# Altium PCB PCB22.PcbDoc
Units mm, origin at the board's own origin, x right, y up, seen from the top; angles counter-clockwise.
Board outline 123.19 x 80.01 mm, 2 copper layers (Top Layer, Bottom Layer); 31 components, 35 nets, 115 pads, 23 vias.
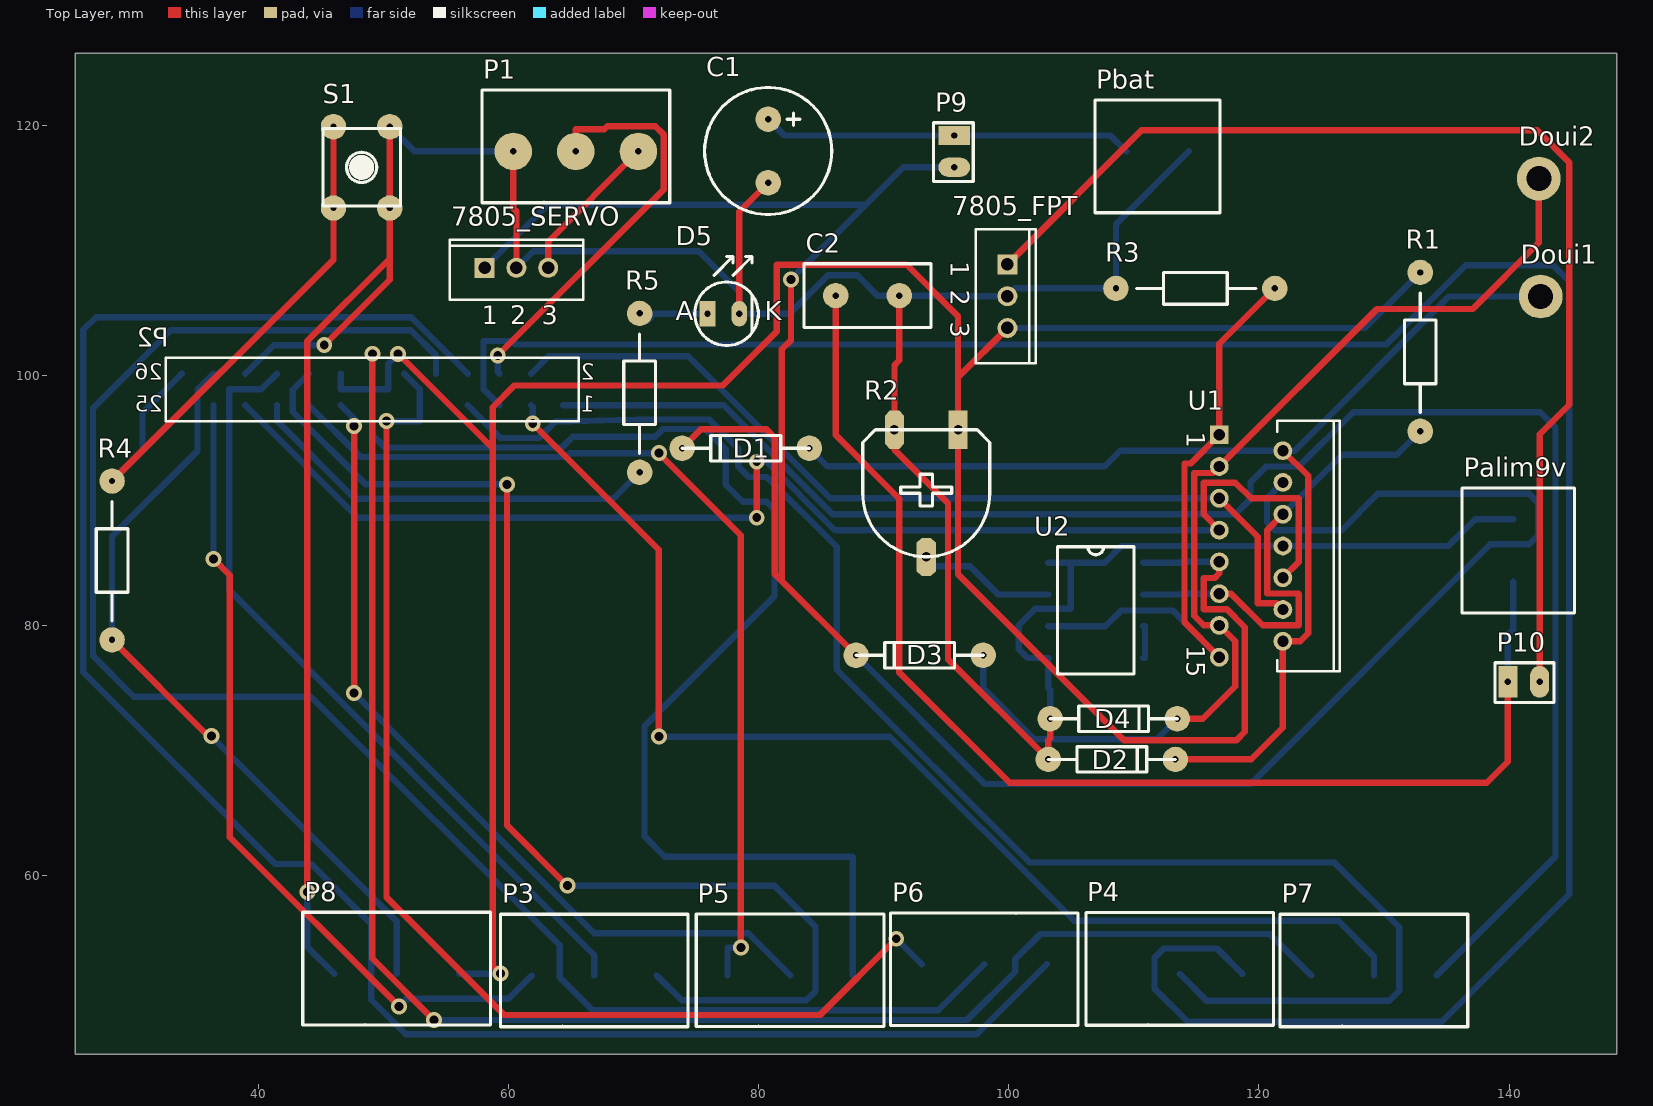
[diagram p0: Top Layer view]
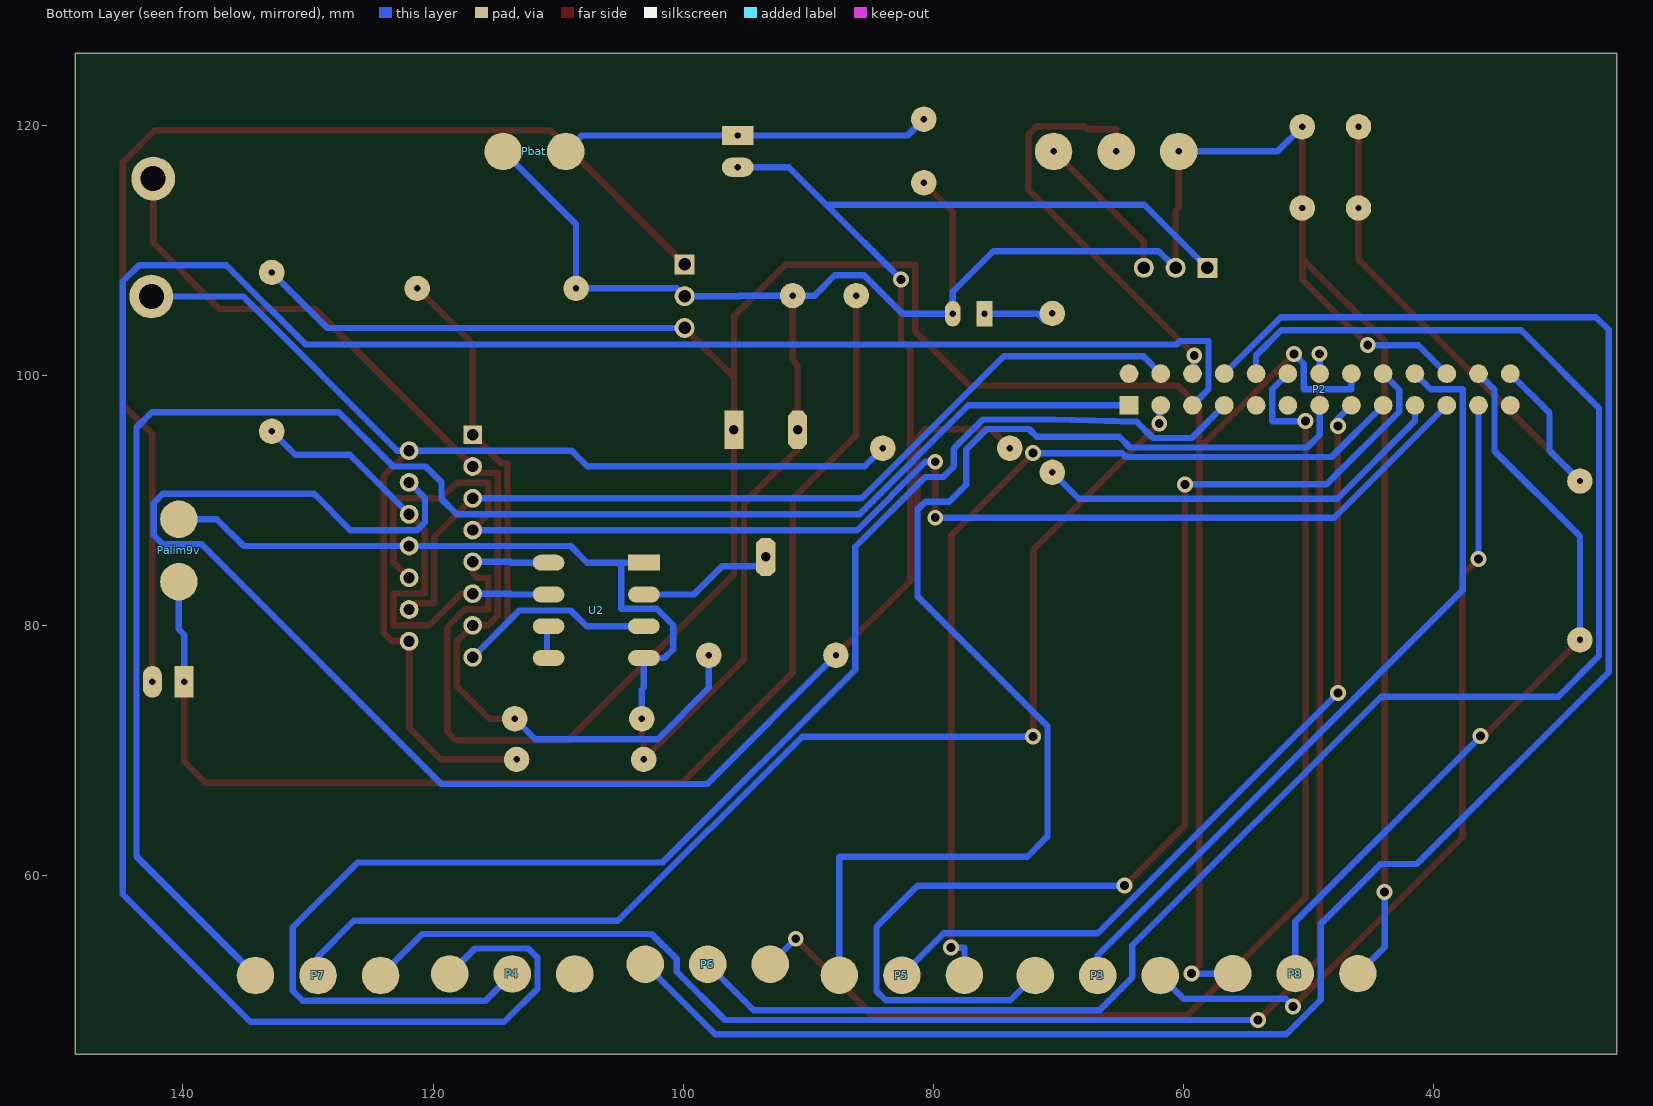
[diagram p1: Bottom Layer view, seen from below]

## Layer stack, top to bottom
Top Layer: signal copper 0.0356
Dielectric: dielectric 0.32, FR-4, Dk 4.8
Bottom Layer: signal copper 0.0356

## Board outline
25.4,125.73 148.59,125.73 148.59,45.72 25.4,45.72

## Design rules (kind name [scope] priority, off if disabled: settings)
Clearance [All] p1: gap=0.254
PolygonConnect [All] p1: connectstyle=Relief reliefconductorwidth=0.254 reliefentries=4 polygonreliefangle="90 Angle"
RoutingLayers RoutingLayers_1 [(InNet('RX') OR InNet('IN1') OR InNet('IN2') OR InNet('IN3'))] p1: top layer_v5=FALSE bottom layer_v5=TRUE
RoutingLayers [All] p2: top layer_v5=TRUE bottom layer_v5=TRUE
RoutingVias [All] p1: holewidth=0.711 width=1.27 viastyle="Through Hole" minholewidth=0.711 minwidth=1.27 maxholewidth=0.711 maxwidth=1.27
SilkscreenOverComponentPads [All] p1: minsilkscreentomaskgap=0.254
SolderMaskExpansion [All] p1: expansion=0.102
Width [All] p1: maxlimit=0.508 minlimit=0.508 preferedwidth=0.508
26 further rules are at their usual default settings.

## Components (designator, comment, footprint, x,y, rotation, side; value= is the part's Value field where it differs from the comment)
7805_FPT "SCR" TO-220-AB 99.9,106.325 r270 top
7805_SERVO "SCR" TO-220-AB 60.65,108.6 r0 top
C1 "Cap Pol2" Capa2_pol 80.775,120.475 r270 top
C2 "Cap2" CAPA2 86.175,106.375 r0 top
D1 "Diode 1N4148" Ddiode 73.9,94.175 r0 top
D2 "Diode 1N4148" Ddiode 113.325,69.3 r180 top
D3 "Diode 1N4148" Ddiode 87.8,77.625 r0 top
D4 "Diode 1N4148" Ddiode 113.475,72.55 r180 top
D5 "Led" LED 75.925,104.925 r0 top
Doui1 "douille_2mm" Douille-2mm 142.525,106.3 r90 top
Doui2 "douille_2mm" Douille-2mm 142.375,115.725 r90 top
P1 "Bornier Servomoteur" Bornier_3#1 72.9,117.9 r180 top
P2 "Header 13X2" HDR2X13 64.375,97.6 r180 top
P3 "Bornier_3" Bornier_3#2 74.375,52.025 r180 top
P4 "Bornier_3" Bornier_3#2 121.175,52.15 r180 top
P5 "Bornier_3" Bornier_3#2 90.025,52.05 r180 top
P6 "Bornier_3" Bornier_3#2 90.55,52.925 r0 top
P7 "Bornier_3" Bornier_3#2 136.7,52.025 r180 top
P8 "Bornier_3" Bornier_3#2 58.575,52.175 r180 top
P9 "Jumper" picot2 95.65,119.175 r0 top
P10 "Jumper" picot2 139.9,75.5 r90 top
Palim9v "Alim 9V" Bornier_2 140.325,81 r90 top
Pbat "Batterie" Bornier_2 106.9,117.9 r0 top
R1 "Res2" res5_1/4W 132.9,95.525 r90 top
R2 "RPot" AJUSTABLE 95.95,95.65 r180 top
R3 "Res2" res5_1/4W 121.275,106.95 r180 top
R4 "Res2" res5_1/4W 28.325,78.85 r90 top
R5 "Res2" res5_1/4W 70.5,92.25 r90 top
S1 "SW-PB" SW_BP 48.275,116.625 r270 top
U1 "L298N" Multiwatt15V 119.38,86.36 r270 top
U2 "LM311N" DIP8 103.15,85.025 r0 top

## Footprints (in the part's own frame and the unit in brackets; to place one, negate y for a bottom-side part, rotate by r counter-clockwise, add the part's x,y. Pads: shape width x height; smd on the part's side, far side on the other; paste and mask are expansions set on the pad)
AJUSTABLE [mil]
  rect 60x120 hole 30: 1(0,0)
  oct 60x120 hole 30: 2(100,400) 3(200,0)
  silkscreen extent -100,0 300,400
Bornier_2 [mm]
  round 3 smd far side: 1(2.5,0) 2(7.5,0)
  silkscreen extent 0,-4.9 10,4.1
Bornier_3#1 [mm]
  round 3 hole 0.508: 1(2.5,0) 2(7.5,0) 3(12.5,0)
  silkscreen extent 0,-4.9 15,4.1
Bornier_3#2 [mm]
  round 3 smd far side: 1(2.5,0) 2(7.5,0) 3(12.5,0)
  silkscreen extent 0,-4.9 15,4.1
CAPA2 [mil]
  round 80 hole 20: 1(0,0) 2(200,0)
  silkscreen extent -100,-100 300,100
Capa2_pol [mil]
  round 80 hole 20: 1(0,0) 2(200,0)
  silkscreen extent -100,-200 300,200
Ddiode [mil]
  round 80 hole 20: A(400,0) K(0,0)
  silkscreen extent 0,-40 400,40
DIP8 [mil]
  rect 100x50 smd far side: 1(0,0)
  oval 100x50 smd far side: 2(0,-100) 3(0,-200) 4(0,-300) 5(300,-300) 6(300,-200) 7(300,-100) 8(300,0)
  silkscreen extent 30,-350 270,50
Douille-2mm [mm]
  round 3.5 hole 2: 1(0,0)
HDR2X13 [mm] "Connector; Header; 13x2 Position"
  rect 1.5x1.5 smd far side: 1(0,0)
  round 1.5 smd far side: 2(0,-2.54) 3(2.54,0) 4(2.54,-2.54) 5(5.08,0) 6(5.08,-2.54) 7(7.62,0) 8(7.62,-2.54) 9(10.16,0) 10(10.16,-2.54) 11(12.7,0) 12(12.7,-2.54) 13(15.24,0) 14(15.24,-2.54) 15(17.78,0) 16(17.78,-2.54) 17(20.32,0) 18(20.32,-2.54) 19(22.86,0) 20(22.86,-2.54) 21(25.4,0) 22(25.4,-2.54) 23(27.94,0) 24(27.94,-2.54) 25(30.48,0) 26(30.48,-2.54)
  silkscreen extent -1.27,-3.81 31.75,1.27
LED [mil]
  rect 50x80 hole 20: 1(0,0)
  oval 50x80 hole 20: 2(100,0)
  silkscreen extent -40,-100 160,180
Multiwatt15V [mm] "TO, Thru-Hole, Vertical, Heatsink Mounted; 15 Bent Staggered Leads; Pitch 1.27 mm"
  rect 1.5x1.5 hole 0.9: 1(-8.89,-2.54)
  round 1.5 hole 0.9: 2(-7.62,2.54) 3(-6.35,-2.54) 4(-5.08,2.54) 5(-3.81,-2.54) 6(-2.54,2.54) 7(-1.27,-2.54) 8(0,2.54) 9(1.27,-2.54) 10(2.54,2.54) 11(3.81,-2.54) 12(5.08,2.54) 13(6.35,-2.54) 14(7.62,2.54) 15(8.89,-2.54)
  silkscreen extent -10,2.09 10,7.09
picot2 [mil]
  rect 100x60 hole 20: 1(0,0)
  oval 100x60 hole 20: 2(0,-100)
  silkscreen extent -65,-145 60,40
res5_1/4W [mil]
  round 80 hole 20: 1(0,0) 2(500,0)
  silkscreen extent 60,-50 435,50
SW_BP [mil]
  round 80 hole 20: 1(-127.95,88.58) 2(127.95,88.58) 3(-127.95,-88.58) 4(127.95,-88.58)
  silkscreen extent -122,-122 122,122
TO-220-AB [mm] "TO, Thru-Hole, Vertical, Heatsink Mounted; 3 In-Line Leads; Pitch 2.54 mm"
  rect 1.6x1.6 hole 1: 1(-2.54,0)
  round 1.6 hole 1: 2(0,0) 3(2.54,0)
  silkscreen extent -5.35,-2.55 5.35,2.25

## Part data
7805_FPT 7805_SERVO: "Silicon Controlled Rectifier"
C1: "Polarized Capacitor (Radial)"
C2: "Capacitor"
D1 D2 D3 D4: "High Conductance Fast Diode"
D5: "LED"
Doui1 Doui2: "1-Pin"
P1: library part Bornier_3, "Header, 3-Pin"
P2: "Header, 13-Pin, Dual row"
P3 P4 P5 P6 P7 P8: "Header, 3-Pin"
Palim9v Pbat: library part Bornier_2, "Header, 2-Pin"
R1 R3 R4 R5: "Resistor"
R2: "Potentiometer"
S1: "Switch"
U1: "Dual Full Bridge Driver"
U2: "Voltage Comparator"

## Via types
v1: diameter 1.27, hole 0.711, Top Layer to Bottom Layer, 23 vias

## Nets (pads, with @x,y where several pads share a name; then routed paths per layer and width w, separated by ;. In a path a pad name is that pad's centre, name@x,y a point inside that pad or via, vN(x,y) a via of type N, cw(c..) or ccw(c..) an arc to the next point about the centre after c; other vN are vias at no path point)
3V3FLYPORT: P2.24 P8.2 R4.1 | length 60.9
  Top Layer w0.508: R4.1 36.017,71.158 v1(36.259,71.158)
  Bottom Layer w0.508: R4.1 28.325,87.126 35.154,93.955 35.154,98.859 P2.24 ; v1(36.259,71.158) 51.075,56.342 P8.2
AN1_23: P2.23 P3.3 | length 65.8
  Top Layer w0.508: v1(36.435,85.333) 37.744,84.023 37.744,63.068 v1(51.257,49.555)
  Bottom Layer w0.508: v1(36.435,85.333) P2.23 ; v1(51.257,49.555) 51.867,50.165 60.015,50.165 P3.3
AN4_18: P2.18 P3.1 | length 97.3
  Top Layer w0.508: v1(59.893,91.288) 59.893,64.033 v1(64.719,59.207)
  Bottom Layer w0.508: P2.18 42.774,98.859 42.774,97.102 48.588,91.288 v1(59.893,91.288) ; v1(64.719,59.207) 81.28,59.207 84.557,55.931 84.557,50.775 83.82,50.038 73.862,50.038 P3.1
AN5_20: P2.20 P3.2 | length 63.3
  Bottom Layer w0.508: P2.20 40.257,98.882 37.694,98.882 37.694,82.837 66.875,53.655 P3.2
BOARD_LED: P2.19 R5.1 | length 33.7
  Bottom Layer w0.508: P2.19 41.515,96.369 47.739,90.145 68.395,90.145 R5.1
EN: R1.1 U1.6 U1.11 U2.7 | length 39.1
  Top Layer w0.508: U1.11 117.773,82.55 120.301,80.022 123.178,80.022 123.178,82.525 123.141,82.562 120.662,82.562 120.662,87.642 U1.6
  Bottom Layer w0.508: U2.7 113.767,82.485 113.832,82.55 U1.11 ; U1.6 126.67,93.65 131.025,93.65 R1.1
GND: 7805_FPT.2 7805_SERVO.2 C1.2 C2.2 D2.A D4.A D5.2 P1.3 P2.22 P8.3 Palim9v.2 Pbat.2 R2.3 R3.2 S1.1 S1.2 U1.8 U2.1 U2.4 | length 288.4
  Top Layer w0.508: v1(43.942,58.699) 43.942,102.743 50.525,109.326 ; v1(45.288,102.413) 50.525,107.65 50.525,109.326 ; S1.1 S1.2 50.525,109.326 ; P1.3 60.4,113.356 60.65,113.106 7805_SERVO.2 ; D5.2 78.465,113.085 C1.2 ; C2.2 91.255,101.198 90.87,100.813 R2.3 90.87,94.042 95.148,89.764 95.148,77.317 D2.A 103.165,70.841 103.315,70.991 D4.A
  Bottom Layer w0.508: P2.22 41.248,102.413 v1(45.288,102.413) ; v1(43.942,58.699) 43.942,54.308 P8.3 ; S1.1 52.5,117.9 P1.3 ; 7805_SERVO.2 61.981,109.931 75.214,109.931 78.465,106.68 D5.2 82.479,104.925 85.554,108.001 87.884,108.001 89.51,106.375 C2.2 95.529,106.375 95.579,106.325 7805_FPT.2 100.525,106.95 R3.2 108.575,112.075 Pbat.2 ; U2.1 104.953,85.025 ; D4.A 103.315,74.879 103.15,75.044 U2.4 101.513,77.405 100.813,78.105 100.813,80.01 102.133,81.331 104.953,81.331 104.953,85.025 ; Palim9v.2 137.287,88.5 135.147,86.36 U1.8 109.006,86.36 107.671,85.025 104.953,85.025
I2C_CLK: P2.1 P7.1 | length 135.3
  Bottom Layer w0.508: P2.1 77.217,97.6 85.917,88.9 118.11,88.9 119.329,90.119 119.329,91.44 120.599,92.71 123.19,92.71 127.533,97.053 142.494,97.053 143.713,95.834 143.713,61.538 P7.1
I2C_DATA: P2.3 P7.2 | length 96.7
  Top Layer w0.508: v1(61.951,96.139) 72.034,86.055 v1(72.034,71.12)
  Bottom Layer w0.508: P2.3 61.951,97.484 v1(61.951,96.139) ; v1(72.034,71.12) 90.505,71.12 105.237,56.388 126.34,56.388 129.2,53.528 P7.2
IN1: P2.5 P4.1 | length 193.8
  Bottom Layer w0.508: P2.5 58.014,98.881 58.014,102.744 60.3,102.744 60.58,102.464 130.179,102.464 136.529,108.814 143.51,108.814 144.805,107.518 144.805,58.522 134.62,48.336 114.3,48.336 111.658,50.978 111.658,53.442 112.395,54.178 116.647,54.178 P4.1
IN2: P2.7 P4.2 | length 123.3
  Bottom Layer w0.508: P2.7 59.359,94.996 62.459,94.996 63.754,96.291 70.307,96.469 76.073,96.469 78.388,94.154 78.388,92.71 79.22,91.878 80.664,91.878 86.258,86.284 86.258,76.479 101.676,61.062 126.035,61.062 131.216,55.88 131.216,50.8 130.429,50.013 115.812,50.013 P4.2
IN3: P4.3
MOTOR1: D1.A D2.K Doui1.1 U1.2 U1.14 | length 99
  Top Layer w0.508: D2.K 119.38,69.3 121.92,71.84 U1.14 123.305,78.74 123.94,79.375 123.94,91.96 U1.2
  Bottom Layer w0.508: D1.A 85.5,92.735 107.671,92.735 108.915,93.98 U1.2 122.866,93.98 135.186,106.3 Doui1.1
MOTOR2: D3.A D4.K Doui2.1 U1.3 U1.13 | length 85.7
  Top Layer w0.508: D4.K 115.527,72.55 118.11,75.133 118.11,78.74 U1.13 115.582,80.01 114.82,80.772 114.82,92.19 116.32,92.19 U1.3 129.438,105.308 137.084,105.308 142.375,110.6 Doui2.1
  Bottom Layer w0.508: D3.A 97.96,75.014 102.057,70.917 111.842,70.917 D4.K
NetD5_1: D5.1 R5.2 | length 5.9
  Bottom Layer w0.508: R5.2 71.1,104.35 71.676,104.925 D5.1
NetR2_2: R2.2 U2.2 | length 11.4
  Bottom Layer w0.508: R2.2 93.41,84.734 96.912,84.734 99.162,82.485 U2.2
NetR3_1: R3.1 U1.1 U1.15 U2.3 | length 49.7
  Top Layer w0.508: U1.15 114.058,80.252 114.058,92.952 114.542,92.952 U1.1 116.84,102.515 R3.1
  Bottom Layer w0.508: U2.3 107.733,79.945 108.991,81.204 113.106,81.204 U1.15
NetU2_5: U2.5 U2.6 | length 2.8
  Bottom Layer w0.508: U2.5 110.897,77.405 110.897,79.945 U2.6
OUT3_PWM: P2.17 P5.3 | length 75.3
  Top Layer w0.508: v1(72.034,93.777) 78.588,87.224 v1(78.588,54.254)
  Bottom Layer w0.508: P2.17 48.183,93.472 64.618,93.472 64.922,93.777 v1(72.034,93.777) ; P5.3 77.525,54.254 v1(78.588,54.254)
PWM1: P2.4 U1.5 U1.12 | length 72.2
  Top Layer w0.508: U1.5 119.9,87.11 119.9,81.788 121.412,81.788 U1.12
  Bottom Layer w0.508: P2.4 63.219,101.524 74.371,101.524 85.725,90.17 U1.5
PWM2: P2.21 U1.7 U1.10 | length 107.6
  Top Layer w0.508: v1(79.858,88.621) v1(79.858,93.091) ; U1.7 115.582,88.888 115.582,91.428 118.122,91.428 119.38,90.17 123.153,90.17 123.178,90.145 123.178,85.078 U1.10
  Bottom Layer w0.508: P2.21 47.954,88.621 v1(79.858,88.621) ; v1(79.858,93.091) 80.649,93.091 86.11,87.63 U1.7
PWM_SERVO: P1.2 P2.6 | length 33.8
  Top Layer w0.508: v1(59.157,101.6) 72.415,114.859 72.415,119.253 71.755,119.913 67.92,119.913 67.666,119.659 65.4,119.659 P1.2
  Bottom Layer w0.508: v1(59.157,101.6) 59.157,100.278 P2.6
RST_B: P2.26 R4.2 S1.3 S1.4 | length 46.6
  Top Layer w0.508: R4.2 46.025,109.25 S1.4 S1.3
  Bottom Layer w0.508: R4.2 30.759,93.984 30.759,97.004 P2.26
RX: P2.13 P5.1 | length 97
  Bottom Layer w0.508: P2.13 49.124,97.589 49.124,95.25 50.14,94.234 64.287,94.234 65.151,95.098 71.755,95.098 72.365,95.707 75.743,95.707 77.381,94.069 77.381,91.268 78.74,89.909 80.645,89.909 81.28,89.274 81.28,82.347 70.891,71.958 70.891,63.144 72.517,61.519 87.503,61.519 87.525,61.497 P5.1
SPI_CLK_8: P2.8 P6.3 | length 155.2
  Bottom Layer w0.508: P2.8 52.247,104.648 27.051,104.648 26.035,103.632 26.035,76.261 41.362,60.933 44.257,60.933 49.047,56.143 49.047,50.089 51.816,47.32 97.445,47.32 P6.3
SPI_CS_14: P2.14 P7.3 | length 131.9
  Top Layer w0.508: v1(49.135,101.727) 49.124,101.716 49.124,53.391 v1(54.051,48.463)
  Bottom Layer w0.508: P2.14 v1(49.135,101.727) ; v1(54.051,48.463) 96.672,48.463 100.533,52.324 100.533,53.34 102.54,55.347 120.878,55.347 P7.3
SPI_IN_12: P2.12 P6.1 | length 95.1
  Top Layer w0.508: v1(50.267,96.342) 50.267,58.293 59.69,48.87 84.913,48.87 v1(91.009,54.966)
  Bottom Layer w0.508: v1(50.267,96.342) 52.934,96.342 52.934,98.881 P2.12 ; v1(91.009,54.966) P6.1
SPI_OUT_10: P2.10 P6.2 | length 138.1
  Bottom Layer w0.508: P2.10 54.215,101.589 52.197,103.607 33.02,103.607 26.797,97.384 26.797,77.572 30.048,74.32 44.221,74.32 64.11,54.432 64.11,51.867 66.726,49.251 94.376,49.251 P6.2
TX: P2.15 P5.2 | length 67.6
  Top Layer w0.508: v1(47.676,74.6) v1(47.676,95.961)
  Bottom Layer w0.508: P2.15 47.676,96.519 v1(47.676,95.961) ; v1(47.676,74.6) 66.878,55.397 79.178,55.397 P5.2
V_5V_FPT: 7805_FPT.3 P2.16 P8.1 R1.2 R2.1 U1.9 U2.8 | length 227.4
  Top Layer w0.508: v1(51.194,101.714) 58.75,94.158 ; v1(59.385,52.172) 58.75,52.807 58.75,94.158 ; 7805_FPT.3 95.95,99.835 ; U1.9 116.84,84.176 116.459,83.795 115.582,83.795 115.582,81.292 117.451,81.292 118.872,79.871 118.872,71.501 118.212,70.841 109.22,70.841 95.95,84.111 R2.1 95.95,99.835 ; 58.75,94.158 58.75,97.46 60.477,99.187 77.14,99.187 81.455,103.502 81.455,108.837 91.837,108.837 95.95,104.724 95.95,99.835
  Bottom Layer w0.508: P2.16 46.595,98.882 50.394,98.882 50.394,100.914 v1(51.194,101.714) ; P8.1 59.382,52.175 v1(59.385,52.172) ; 7805_FPT.3 128.46,103.785 R1.2 ; U2.8 113.767,85.025 113.832,85.09 U1.9
V_5V_SERVO: 7805_SERVO.3 P1.1 | length 12.3
  Top Layer w0.508: 7805_SERVO.3 63.19,110.69 P1.1
V_9V: 7805_FPT.1 P10.2 | length 92.9
  Top Layer w0.508: 7805_FPT.1 110.618,119.583 142.24,119.583 144.805,117.018 144.805,97.663 142.44,95.298 P10.2
V_9V_BORNIER: C2.1 P10.1 Palim9v.1 | length 99.8
  Top Layer w0.508: C2.1 86.175,95.232 91.262,90.145 91.262,76.251 100.076,67.437 138.224,67.437 139.9,69.113 P10.1
  Bottom Layer w0.508: P10.1 139.9,79.273 140.325,79.698 Palim9v.1
V_BAT: 7805_SERVO.1 D1.K D3.K P9.2 U1.4 | length 198.9
  Top Layer w0.508: D1.K 75.407,95.682 80.645,95.682 81.307,95.02 81.307,84.118 81.864,83.561 ; v1(82.601,107.671) 82.601,102.819 81.864,102.083 81.864,83.561 ; D3.K 81.864,83.561
  Bottom Layer w0.508: 7805_SERVO.1 63.15,113.64 88.57,113.64 ; v1(82.601,107.671) 88.57,113.64 ; D3.K 98.09,67.335 119.355,67.335 138.506,86.487 141.605,86.487 142.342,87.224 142.342,89.789 141.605,90.526 129.515,90.526 126.619,87.63 121.285,87.63 120.65,88.265 120.65,90.17 U1.4 ; P9.2 91.565,116.635 88.57,113.64
V_BAT_BORNIER: C1.1 P9.1 Pbat.1 | length 29.7
  Bottom Layer w0.508: C1.1 82.075,119.175 P9.1 108.125,119.175 Pbat.1
pads on no net: P2.2 P2.9 P2.11 P2.25

## Dimensions
148.59,45.72 to 25.4,45.72 on Top Layer
148.59,45.72 to 148.59,125.73 on Top Layer

## Text inside footprints (layer, text, board x,y; h text height)
7805_FPT: Top Overlay "3" at 95.375,104.285 h1.5 r270; Top Overlay "2" at 95.375,106.825 h1.5 r270; Top Overlay "1" at 95.375,109.115 h1.5 r270
7805_SERVO: Top Overlay "3" at 62.69,104.075 h1.5; Top Overlay "2" at 60.15,104.075 h1.5; Top Overlay "1" at 57.86,104.075 h1.5
D5: Top Overlay "A" at 73.385,104.417 h1.52; Top Overlay "K" at 80.497,104.417 h1.52
P2: Top Overlay "26" at 32.371,99.632 h1.27; Top Overlay "25" at 32.371,97.092 h1.27; Top Overlay "1" at 66.915,97.092 h1.27; Top Overlay "2" at 66.915,99.632 h1.27
U1: Top Overlay "1" at 114.215,95.48 h1.5 r270; Top Overlay "15" at 114.215,78.42 h1.5 r270